# Altium PCB Synth.PcbDoc
Units mm, origin at the board's own origin, x right, y up, seen from the top; angles counter-clockwise.
Board outline 129.1 x 55.6 mm, 2 copper layers (Top Layer, Bottom Layer), stack 1.671 mm thick; 51 components, 33 nets, 121 pads, 0 vias.
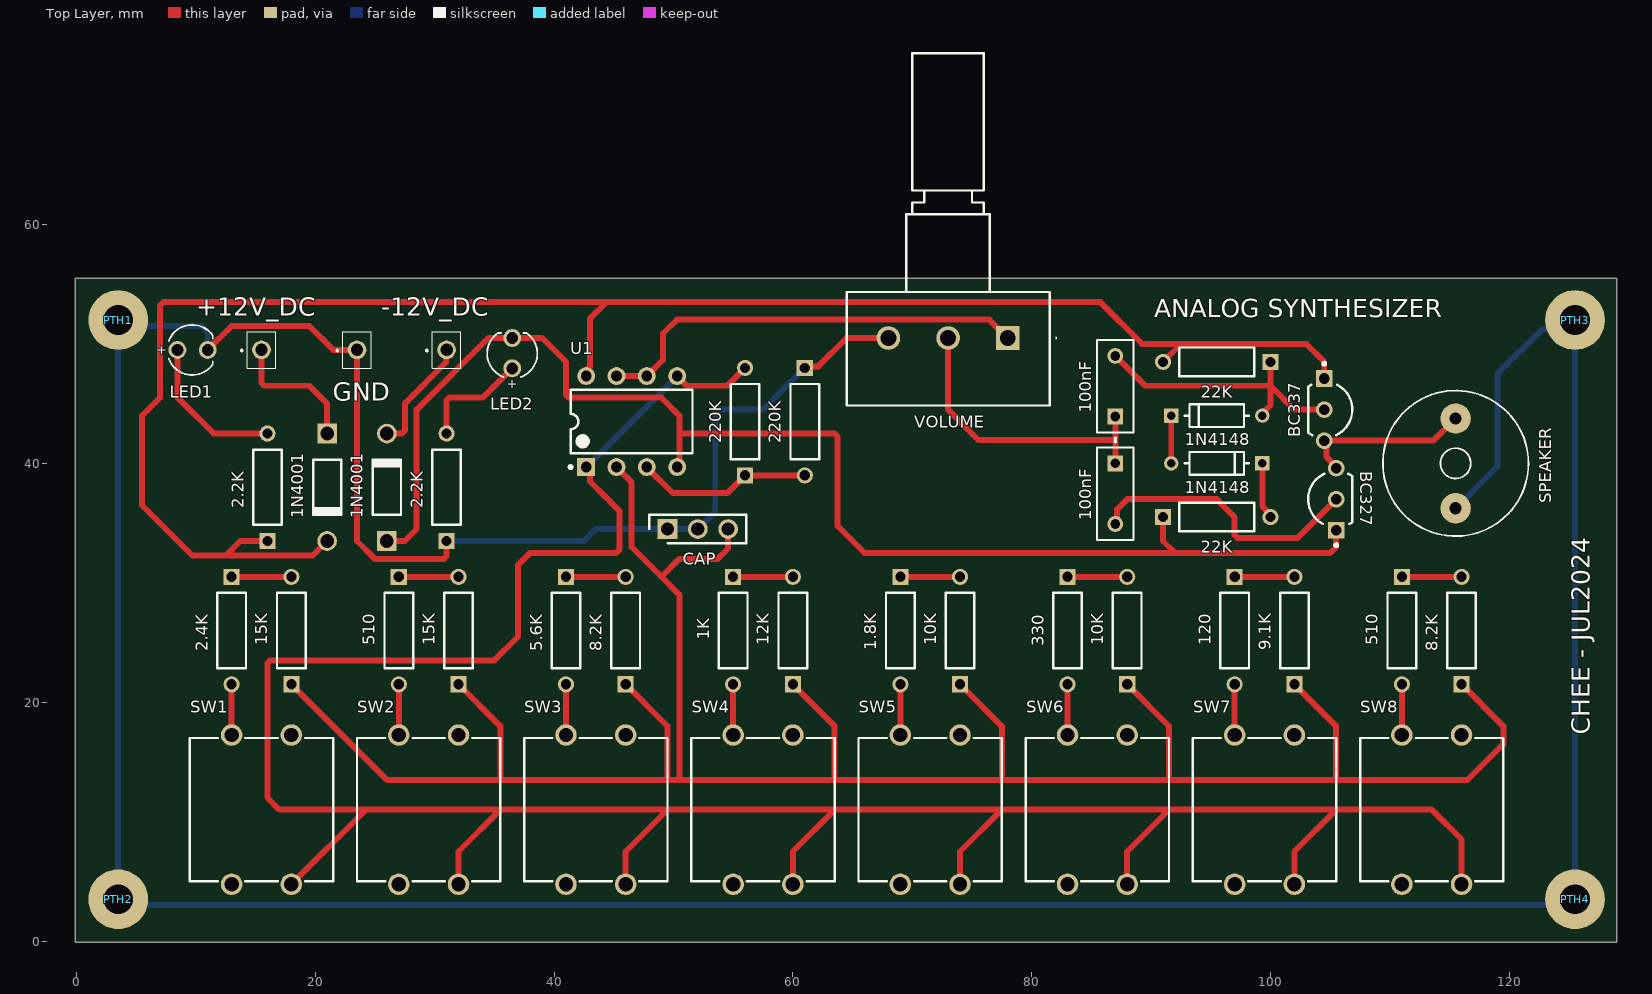
[diagram p0: Top Layer view]
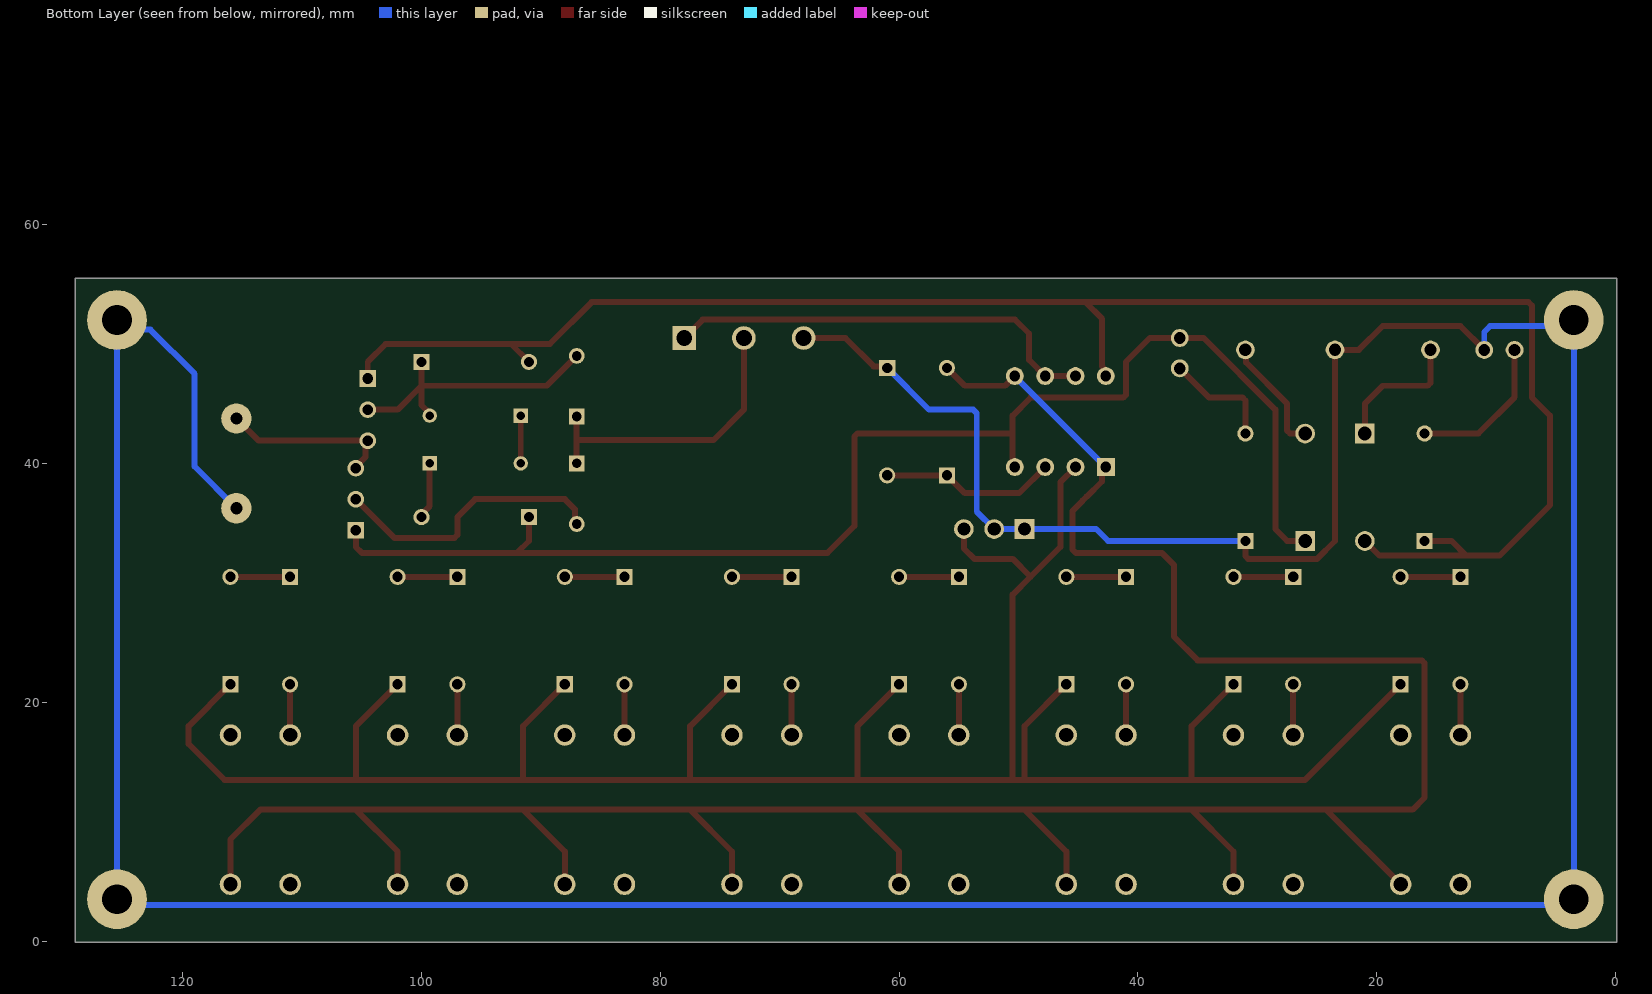
[diagram p1: Bottom Layer view, seen from below]

## Layer stack, top to bottom
Top Solder: solder mask 0.0102, Solder Resist, Dk 3.5
Top Layer: signal copper 0.0356
Dielectric 1: dielectric 1.6, FR-4, Dk 4.8
Bottom Layer: signal copper 0.0356
Bottom Solder: solder mask 0.0102, Solder Resist, Dk 3.5

## Board outline
-0.1,-0.1 129,-0.1 129,55.5 -0.1,55.5

## Design rules (kind name [scope] priority, off if disabled: settings)
Clearance Clearance_1 [All] p1: gap=0.3 ignorepadtopadclearanceinfootprint=FALSE
Clearance Clearance_1 [OnMid vs OnMid] p2: gap=0.254 ignorepadtopadclearanceinfootprint=FALSE sourcerule=40 cellrowname=All cellrowtype=0 cellcolname=All cellcoltype=0 innerlayers=TRUE
Clearance Clearance_2 [(ExistsOnLayer('Top Layer') Or ExistsOnLayer('Bottom Layer')) vs (ExistsOnLayer('Top Layer') Or ExistsOnLayer('Bottom Layer'))] p3: gap=0.254 ignorepadtopadclearanceinfootprint=FALSE sourcerule=40 cellrowname=All cellrowtype=0 cellcolname=All cellcoltype=0 outerlayers=TRUE
Clearance [All] p4: gap=0.254 ignorepadtopadclearanceinfootprint=FALSE ismatrix=TRUE
PolygonConnect [All] p1: connectstyle=Relief reliefconductorwidth=0.254 reliefentries=4 polygonreliefangle="90 Angle" airgapwidth=0.254
RoutingVias RoutingViaStyle_1 [All] p1: holewidth=0.3 width=0.6 viastyle="Through Hole" minholewidth=0.3 minwidth=0.6 maxholewidth=0.3 maxwidth=0.6
RoutingVias [All] p2: holewidth=0.711 width=1.27 viastyle="Through Hole" minholewidth=0.711 minwidth=1.27 maxholewidth=0.711 maxwidth=1.27
SilkToSolderMaskClearance [IsPad] p1: minsilkscreentomaskgap=0.1 clearancetoexposedcopper=TRUE
SolderMaskExpansion [All] p1: expansion=0.102 istentingtop=FALSE
SupplyNets "Schematic Supply Nets" [InNet('GND')] p1: voltage=0.000
Width MaxMinWidth_1 [All] p1: maxlimit=1 minlimit=0.3 preferedwidth=0.5 minimp=50.000000 maximp=50.000000 favimp=50.000000
Width [All] p2: maxlimit=0.254 minlimit=0.254 preferedwidth=0.254
29 further rules are at their usual default settings.

## Classes and differential pairs
component class Synth: 1.8K 1K 1N4001 1N4148 2.2K 2.4K 5.6K 8.2K 9.1K 10K 12K 15K 22K 120 220K 330 510 +12V_DC -12V_DC BC327 BC337 CAP GND LED1 LED2 PTH1 PTH2 PTH3 PTH4 SPEAKER SW1 SW2 SW3 SW4 SW5 SW6 SW7 SW8 U1 VOLUME

## Components (designator, comment, footprint, x,y, rotation, side; value= is the part's Value field where it differs from the comment)
1.8K "1.8K" RESA60-630X240 69,26 r270 top (schematic designator R10)
1K "1K" RESA60-630X240 55,26 r270 top (schematic designator R12)
1N4001 "1N4001-T" DIOD-DO-41-P-2_V 26,38 r90 top (schematic designator D4)
1N4001 "1N4001-T" DIOD-DO-41-P-2_V 21,38 r270 top (schematic designator D3)
1N4148 "1N4148" FP-017AG-MFG 95.5,40 r180 top (schematic designator D2)
1N4148 "1N4148" FP-017AG-MFG 95.5,44 r0 top (schematic designator D1)
2.2K "2.2K" RESA60-630X240 31,38 r90 top (schematic designator RI2)
2.2K "2.2K" RESA60-630X240 16,38 r90 top (schematic designator RI1)
2.4K "2.4K" RESA60-630X240 13,26 r270 top (schematic designator R18)
5.6K "5.6K" RESA60-630X240 41,26 r270 top (schematic designator R14)
8.2K "8.2K" RESA60-630X240 46,26 r90 top (schematic designator R13)
8.2K "8.2K" RESA60-630X240 116,26 r90 top (schematic designator R3)
9.1K "9.1K" RESA60-630X240 102,26 r90 top (schematic designator R5)
10K "10K" RESA60-630X240 74,26 r90 top (schematic designator R9)
10K "10K" RESA60-630X240 88,26 r90 top (schematic designator R7)
12K "12K" RESA60-630X240 60,26 r90 top (schematic designator R11)
15K "15K" RESA60-630X240 18,26 r90 top (schematic designator R17)
15K "15K" RESA60-630X240 32,26 r90 top (schematic designator R15)
22K "22K" RESA60-630X240 95.5,35.5 r0 top (schematic designator Rb)
22K "22K" RESA60-630X240 95.5,48.5 r180 top (schematic designator Ra)
100nF "100nF" CAP_MKT1817_7p2x2p5x6p5-5_VIS 87,40 r270 top (schematic designator C3)
100nF "100nF" CAP_MKT1817_7p2x2p5x6p5-5_VIS 87,43.92 r90 top (schematic designator C2)
120 "120" RESA60-630X240 97,26 r270 top (schematic designator R6)
220K "220K" RESA60-630X240 56,43.5 r90 top (schematic designator R2)
220K "220K" RESA60-630X240 61,43.5 r270 top (schematic designator R1)
330 "330" RESA60-630X240 83,26 r270 top (schematic designator R8)
510 "510" RESA60-630X240 27,26 r270 top (schematic designator R16)
510 "510" RESA60-630X240 111,26 r270 top (schematic designator R4)
+12V_DC "SSW-101-01-G-S" SSW-101-XX-YYY-S 15.5,49.5 r270 top
-12V_DC "SSW-101-01-G-S" SSW-101-XX-YYY-S 31,49.5 r270 top
BC327 "BC327" ONSC-TO-92-3-29-11_AM_BL 105.5,37 r90 top (schematic designator Q2)
BC337 "BC337" ONSC-TO-92-3-29-11_AM_BL 104.5,44.5 r270 top (schematic designator Q1)
CAP "SSW-103-01-G-S" RHDR3W64P0X254_1X3_813X241X851P 49.5,34.5 r0 top (schematic designator J1)
GND "SSW-101-01-G-S" SSW-101-XX-YYY-S 23.5,49.5 r270 top
LED1 "151031VS04000" WL-TMRC_D3.95H5.3 1279.73,1319.5 r0 top
LED2 "151031VS04000" WL-TMRC_D3.95H5.3 -1233.5,1319.23 r90 top
PTH1 "PTH-M2D5X5" PTH-M2D5X5 3.5,52 r0 top
PTH2 "PTH-M2D5X5" PTH-M2D5X5 3.5,3.5 r0 top
PTH3 "PTH-M2D5X5" PTH-M2D5X5 125.5,52 r0 top
PTH4 "PTH-M2D5X5" PTH-M2D5X5 125.5,3.5 r0 top
SPEAKER "SPEAKER" AL60P 115.5,40 r270 top (schematic designator HX1)
SW1 "12x12mm" 4304x60857x6 15.5,11 r270 top
SW2 "12x12mm" 4304x60857x6 29.5,11 r270 top
SW3 "12x12mm" 4304x60857x6 43.5,11 r270 top
SW4 "12x12mm" 4304x60857x6 57.5,11 r270 top
SW5 "12x12mm" 4304x60857x6 71.5,11 r270 top
SW6 "12x12mm" 4304x60857x6 85.5,11 r270 top
SW7 "12x12mm" 4304x60857x6 99.5,11 r270 top
SW8 "12x12mm" 4304x60857x6 113.5,11 r270 top
U1 "TL072CP" P0008A 46.5,43.5 r90 top
VOLUME "100k LOG" PDB181K420K104A2 78,50.5 r180 top (schematic designator VR1)

## Footprints (in the part's own frame and the unit in brackets; to place one, negate y for a bottom-side part, rotate by r counter-clockwise, add the part's x,y. Pads: shape width x height; smd on the part's side, far side on the other; paste and mask are expansions set on the pad)
4304x60857x6 [mm] "12x12mm washable Tact Switch, THT version"
  round 1.8 hole 1.2: A1(-6.25,2.5) A2(6.25,2.5) B1(-6.25,-2.5) B2(6.25,-2.5)
  silkscreen extent -6,-6 6,6, body extent -6.99,-6 6.99,6, height 8.55
AL60P [mil]
  round 100 hole 40: 1(-148,0) 2(148,0)
  silkscreen extent -240,-240 240,240
CAP_MKT1817_7p2x2p5x6p5-5_VIS [mil]
  rect 52x52 / inner round 60 / far side rect 52x52 hole 32 paste-99999 mask+0: 1(0,0)
  round 52 / inner round 60 / far side round 52 hole 32 paste-99999 mask+0: 2(200,0)
  silkscreen extent -85,-60 252,60, body extent -47,-55 247,55, height 260
DIOD-DO-41-P-2_V [mm] "2-Leads, Axial Lead, Body 4.635x2.36mm, Pin Spacing 9mm"
  rect 1.65x1.65 hole 1.15: 1(-4.5,0)
  round 1.65 hole 1.15: 2(4.5,0)
  silkscreen extent -2.32,-1.18 2.32,1.18, body extent -4.93,-1.18 4.93,1.18, height 2.35
FP-017AG-MFG [mm]
  rect 1.2x1.2 hole 0.7 paste-2539.97 mask+0: 1(-3.813,0)
  round 1.2 hole 0.7 paste-2539.97 mask+0: 2(3.813,0)
  silkscreen extent -2.68,-0.95 2.68,0.95, body extent -4.51,-1.05 4.51,1.05, height 0.25
ONSC-TO-92-3-29-11_AM_BL [mm] "TO, 3-Leads, Body Dia 4.7mm, Pitch 2.6mm"
  rect 1.4x1.4 hole 0.9: 1(-2.6,0)
  round 1.4 hole 0.9: 2(0,0) 3(2.6,0)
  silkscreen extent -3.97,-1.34 2.13,2.35, body extent -2.84,-1.34 2.84,2.35, height 5.33
P0008A [mm] "DIP, 8-Leads, Body 10.15x6.6mm, Pitch 2.54mm"
  rect 1.5x1.5 hole 0.9: 1(-3.81,3.81)
  round 1.5 hole 0.9: 2(-3.81,1.27) 3(-3.81,-1.27) 4(-3.81,-3.81) 5(3.81,-3.81) 6(3.81,-1.27) 7(3.81,1.27) 8(3.81,3.81)
  silkscreen extent -3.93,-5.1 2.65,5.23, body extent -3.95,-5.07 3.95,5.07, height 5.08
PDB181K420K104A2 [mm]
  rect 1.98x1.98 hole 1.32: 1(0,0)
  round 1.98 hole 1.32: 2(5,0) 3(10,0)
  silkscreen extent -4.1,-23.85 13.5,5.65
PTH-M2D5X5 [mm]
  round 5 hole 2.5: 1(0,0)
RESA60-630X240 [mm] "Axial Resistor, 2-Leads, Dia 2.4mm, Body Length 6.3mm"
  rect 1.35x1.35 hole 0.85: 1(-4.5,0)
  round 1.35 hole 0.85: 2(4.5,0)
  silkscreen extent -3.15,-1.2 3.15,1.2, body extent -3.15,-1.2 3.15,1.2, height 2.4
RHDR3W64P0X254_1X3_813X241X851P [mm]
  rect 1.65x1.65 hole 1.1: 1(0,0)
  round 1.65 hole 1.1: 2(2.54,0) 3(5.08,0)
  silkscreen extent -1.53,-1.2 6.61,1.2, body extent -1.53,-1.2 6.61,1.2, height 8.51
SSW-101-XX-YYY-S [mm]
  round 1.57 hole 1.04: 1(0,0)
  silkscreen extent -1.53,-1.7 1.53,1.2, body extent -1.53,-1.2 1.53,1.2, height 8.51
WL-TMRC_D3.95H5.3 [mm] "THT Mono-color Round Color LED, 2-leads"
  round 1.5 hole 1: 1(-1271.27,-1270) 2(-1268.73,-1270)
  silkscreen extent -1272,-1272.1 -1268.31,-1267.9, body extent -1271.99,-1271.97 -1268.37,-1268.03, height 5.35

## Part data
1.8K 1K 2.2K 2.2K 2.4K 5.6K 8.2K 8.2K 9.1K 10K 10K 12K 15K 15K 22K 22K 120 220K 220K 330 510 510: library part CMP-1659-00074-2, "Axial Resistor, 10 KOhm, +/- 1%, 0.25 W, -55 to 155 degC, 2-Pin THD, RoHS, Bulk", Case\/Package=Axial, Manufacturer=Yageo, Max Operating Temperature=155degC, Max Power Dissipation=250mW, Min Operating Temperature=-55degC, Package Description="2-Pin Axial Lead, Dia 2.4 mm, Body Length 6.3 mm", Package Quantity=200, Package Reference=MFR-25, Resistance=10KOhm, Temperature Coefficient=100ppm\/degreesC, Tolerance=1%, Voltage Rating=250V, Voltage Rating (DC)=200V, Composition=MetalFilm, Datasheet URL=http://www.yageo.com/documents/recent/Yageo%20LR_MFR_2013.pdf, Datasheet Version=04/2013, Lead Free=LeadFree, Length=0.248inch, Manufacturer URL=http://www.yageo.com/, Military Standard=Not, Mount=ThroughHole, Mounting Technology=ThroughHole, Number of Terminations=2, Packaging=Bulk, Power Rating=250mW, RoHSCompliant=True, Termination=Axial
1N4001 1N4001: library part CMP-0639-00006-2, "1.0 A Rectifier, 15 pF, 50 V, -65 to 150 degC, 2-Pin DO-41 Plastic, RoHS, Tape and Reel", Manufacturer="Diodes Inc", Max. Average Rectified Current IO (A)=1, Operating Temperature Range (degC)="-65 to 150", ComponentLink1Description="Manufacturer URL", ComponentLink1URL=http://diodes.com/, ComponentLink2Description=Datasheet, ComponentLink2URL=http://diodes.com/datasheets/ds28002.pdf, CT (pF)=15, DatasheetVersion="Rev. 8-2", Max. IFSM (A)=30, Max. IR (uA)=5, Mounting Technology="Through Hole", PackageDescription="2-Pin Axial Lead, Body 4.635 x 2.36 mm, Lead Spread 25.4 mm", PackageReference=DO-41-P-2, Packing="Tape and Reel", PartNumber=1N4001-T, RoHS=TRUE, VF (V)=1, VRRM (V)=50
1N4148 1N4148: library part CMP-07163-000046-1, "DIODE GEN PURP 100V 200MA DO35", Average Rectified Current=200mA, Capacitance=4pF, Case/Package=DO-35, Current=4A, Forward Current=300mA, Forward Voltage=1V, Max Forward Surge Current (Ifsm)=1A, Max Operating Temperature=175°C, Max Power Dissipation=500mW, Max Repetitive Reverse Voltage (Vrrm)=100V, Max Reverse Current=5uA, Min Operating Temperature=-65°C, Package Quantity=2000, Contact Plating=Tin, Current Rating=200mA, Diameter=1.91mm, Element Configuration=Single, Height=4.56mm, Lead Free="Lead Free", Length=4.56mm, Max Reverse Voltage (DC)=100V, Max Surge Current=4A, Mount="Through Hole", Number of Pins=2, Output Current=200mA, Outside Diameter=1.85mm, Packaging=Bulk, Peak Non-Repetitive Surge Current=4A, Polarity=Standard, Power Dissipation=500mW, Radiation Hardening=No, REACH SVHC="No SVHC", Recovery Time=4ns, Reverse Recovery Time=4ns, Reverse Voltage=100V, Series=-, Voltage=100V, Voltage Rating (DC)=100V, Weight=0.01lb, Width=1.91mm
100nF 100nF: library part CMP-001-00083-1, "MKT1817410064W", Mfr_Name=Vishay, Design Item ID=MKT1817410064W, Source=MKT1817410064W.SchLib, Type="Film Capacitors"
+12V_DC -12V_DC GND: "Connector", Manufacturer_Name=SAMTEC, Mouser Part Number=200-SSW10101GS, Arrow Part Number=SSW-101-01-G-S, Arrow Price/Stock=https://www.arrow.com/en/products/ssw-101-01-g-s/samtec, Datasheet Link=http://suddendocs.samtec.com/prints/ssw-1xx-xx-xxx-x-xx-xxx-xx-mkt.pdf, Height=8.51mm, Manufacturer_Part_Number=SSW-101-01-G-S, Mouser Price/Stock=https://www.mouser.co.uk/ProductDetail/Samtec/SSW-101-01-G-S?qs=rU5fayqh%252BE20ZXdRgwMbIg%3D%3D
BC327: library part CMP-1048-01577-1, "Amplifier Transistor, PNP Silicon, 3-Pin TO-92, Pb-Free, Ammo Box", Manufacturer="On Semiconductor", PartNumber=BC327-25ZL1G, ComponentLink1Description="Manufacturer URL", ComponentLink1URL=http://www.onsemi.com/, ComponentLink2Description=Datasheet, ComponentLink2URL=http://www.onsemi.com/pub_link/Collateral/BC327-D.PDF, ComponentLink3Description="Package Specification", ComponentLink3URL=http://www.onsemi.com/pub_link/Collateral/MAC97-D.PDF, DatasheetVersion="Rev. 6", IC Continuous (A)=-0.8, Mounting Technology="Through Hole", PackageDescription="3-Pin Transistor Outline, Body 4.825 x 3.685 mm, Pitch 1.27 mm", PackageReference=TO-92-3-29-11_AM_BL, PackageVersion="Rev. AM", Packing="Ammo Box", Polarity=PNP, RoHS=TRUE
BC337: library part CMP-1048-01583-1, "Amplifier Transistor, NPN Silicon, 3-Pin TO-92, Pb-Free, Ammo Box", Manufacturer="On Semiconductor", PartNumber=BC337-40ZL1G, ComponentLink1Description="Manufacturer URL", ComponentLink1URL=http://www.onsemi.com/, ComponentLink2Description=Datasheet, ComponentLink2URL=http://www.onsemi.com/pub_link/Collateral/BC337-D.PDF, ComponentLink3Description="Package Specification", ComponentLink3URL=http://www.onsemi.com/pub_link/Collateral/MAC97-D.PDF, DatasheetVersion="Rev. 8", IC Continuous (A)=0.8, Mounting Technology="Through Hole", PackageDescription="3-Pin Transistor Outline, Body 4.825 x 3.685 mm, Pitch 1.27 mm", PackageReference=TO-92-3-29-11_AM_BL, PackageVersion="Rev. AM", Packing="Ammo Box", Polarity=NPN, RoHS=TRUE
CAP: "Connector", Manufacturer_Name=SAMTEC, Mouser Part Number=200-SSW10301GS, Arrow Part Number=SSW-103-01-G-S, Arrow Price/Stock=https://www.arrow.com/en/products/ssw-103-01-g-s/samtec?region=europe, Datasheet Link=http://suddendocs.samtec.com/prints/ssw-1xx-xx-xxx-x-xx-xxx-xx-mkt.pdf, Height=8.51mm, Manufacturer_Part_Number=SSW-103-01-G-S, Mouser Price/Stock=https://www.mouser.co.uk/ProductDetail/Samtec/SSW-103-01-G-S?qs=rU5fayqh%252BE2RqqT6UA0Qew%3D%3D
LED1 LED2: library part CMP-1488-00001-2, Case/Package=Radial, Color=Green, Forward Current=100mA, Forward Voltage=2.1V, Max Operating Temperature=85°C, Max Reverse Voltage (DC)=5V, Min Operating Temperature=-40°C, Test Current=20mA, Dominant Wavelength=570nm, Height=5.3mm, Length=3mm, Lens Size=3mm, Lens Style="Circular, Diffused, Round", Luminous Intensity=120mcd, Mount="Through Hole", NexarPartId=29717804, Number of Pins=2, Packaging=Bulk, Peak Wavelength=573nm, REACH SVHC=Unknown, RoHS=Compliant, Viewing Angle=40°, Wavelength=570nm, Width=3mm
PTH1 PTH2 PTH3 PTH4: library part CMP-00028-00004-2, "M2 PTH (2.5mm), 5mm pad", Pins=1
SPEAKER: library part CMP-006-000000-1, "8 Ohms Low Profile Speaker 250mW 380Hz ~ 10kHz Top Round 93dB", Package="WFBGA-12 Texas Instruments", Availability=Unavailable, Component Type=Standard, Design Item ID=SPEAKER, MF="Texas Instruments", MP=SPEAKER, Pin Count=2, Price=None, SnapEDA_Link=https://www.snapeda.com/parts/SPEAKER/Texas%20Instruments/view-part/2776836/?ref=snap, Source=SnapEDAsch.SchLib
SW1 SW2 SW3 SW4 SW5 SW6 SW7 SW8: library part CMP-1456-00009-2, Contact Current Rating=50mA, Insulation Resistance=100MΩ, Max Operating Temperature=85°C, Min Operating Temperature=-40°C, Voltage Rating=12V, Actuator Length=5mm, Actuator Material="Liquid Crystal Polymer, Polymer", Contact Material="Silver, Stainless Steel", Contact Plating=Silver, Current Rating=50mA, Height=8.5mm, Illumination Type="Illuminated, Non-Illuminated", Mechanical Life=500kcycles, Mount="Through Hole", NexarPartId=31136480, Packaging=Bulk, REACH SVHC="No SVHC", RoHS=Compliant, Switch Function=Off-Mom, Switch Travel=300µm, Termination="PC Pin", Throw Configuration=SPST
U1: library part CMP-0017-00950-2, "Dual Low-Noise JFET-Input General-Purpose Operational Amplifier, 7 to 36 V, 0 to 70 degC, 8-pin DIP (P8), Pb-Free (RoHS)", Manufacturer="Texas Instruments", Rating=Catalog, Total Supply Voltage(Max)(+5V is 5, +/-5V is 10)=36, Total Supply Voltage(Min)(+5V is 5, +/-5V is 10)=7, CMRR(Min)(dB)=70, Code_JEDEC=MS-001, ComponentLink1Description="Manufacturer URL", ComponentLink1URL=http://www.ti.com/, ComponentLink2Description=Datasheet, ComponentLink2URL=http://www.ti.com/lit/ds/symlink/tl072.pdf, ComponentLink3Description="Package Specification", ComponentLink3URL=http://www.ti.com/litv/pdf/mpdi001b, DatasheetVersion=SLOS080J, Eco-Plan="Pb-Free (RoHS)", GBW(Typ)(MHz)=3, IIB(Max)(pA)=200, Iq per channel(Max)(mA)=2.5, Mounting Technology="Through Hole", Number of Channels=2, Offset Drift(Typ)(uV/C)=18, PackageDescription="8-Pin Plastic In-Line, Body 9.59 x 6.35 mm, Pitch 2.54 mm", PackageReference=P0008A, PackageVersion="4040082/E, 04/2010", PartNumber=TL072CP, Slew Rate(Typ)(V/us)=13, Sub Family="General Purpose Amplifier, High Supply Voltage Amplifier (>=30V)", Vio (25C)(Max)(mV)=10, Vn at 1kHz(Typ)(nV/rtHz)=18
VOLUME: library part PDB181-K420K-104A2, "Variable Resistor PDB181-K420K-104A2", Manufacturer_Name=Bourns, Mouser Part Number=652-PDB181K420K104A2, Arrow Part Number=PDB181-K420K-104A2, Arrow Price/Stock=https://www.arrow.com/en/products/pdb181-k420k-104a2/bourns?region=nac, Datasheet Link=https://www.bourns.com/docs/Product-Datasheets/PDB18.pdf, Height=16.5mm, Manufacturer_Part_Number=PDB181-K420K-104A2, Mouser Price/Stock=https://www.mouser.com/Search/Refine.aspx?Keyword=652-PDB181K420K104A2

## Nets (pads, with @x,y where several pads share a name; then routed paths per layer and width w, separated by ;. In a path a pad name is that pad's centre, name@x,y a point inside that pad or via, vN(x,y) a via of type N, cw(c..) or ccw(c..) an arc to the next point about the centre after c; other vN are vias at no path point)
+PWR_IND: 2.2K.2@16,42.5 LED1.1 | length 12.8
  Top Layer w0.5: LED1.1 8.46,45.54 11.5,42.5 2.2K.2@16,42.5
-PWR_IND: 2.2K.2@31,42.5 LED2.1 | length 9.4
  Top Layer w0.5: 2.2K.2@31,42.5 31,45.266 31.234,45.5 34.04,45.5 LED2.1
BUFFER: 220K.2@56,48 SW1.A2 SW2.A2 SW3.A2 SW4.A2 SW5.A2 SW6.A2 SW7.A2 SW8.A2 U1.1 U1.5 | length 234
  Top Layer w0.5: SW1.A2 24.25,11 ; SW2.A2 32,7.5 35.5,11 ; U1.1 43.017,39.363 43.017,38.483 44.29,37.21 44.308,37.21 44.63,36.888 44.63,36.87 45.5,36 45.5,32.793 45.207,32.5 38,32.5 37,31.5 37,25.5 35,23.5 16.234,23.5 16,23.266 16,12 17,11 24.25,11 ; SW3.A2 46,7.5 49.5,11 ; U1.5 U1.5@50.581,47.31 ; U1.5@50.445,47.175 51.12,46.5 54.5,46.5 220K.2@56,48 ; SW4.A2 60,7.5 63.5,11 ; SW5.A2 74,7.5 77.5,11 ; SW6.A2 88,7.5 91.5,11 ; SW7.A2 102,7.5 105.5,11 ; SW8.A2 116,8.5 113.5,11 105.5,11 ; 24.25,11 35.5,11 ; 35.5,11 49.5,11 ; 49.5,11 63.5,11 ; 63.5,11 77.5,11 ; 77.5,11 91.5,11 ; 91.5,11 105.5,11
  Bottom Layer w0.5: U1.1 U1.5
GND: 2.2K.1@31,33.5 220K.1@61,48 CAP.1 CAP.2 GND.1 LED1.2 PTH1.1 PTH2.1 PTH3.1 PTH4.1 SPEAKER.2 VOLUME.3 | length 338.4
  Top Layer w0.5: LED1.2 13,51.5 19.5,51.5 21.5,49.5 GND.1 23.5,33.5 25,32 30.766,32 31,32.234 2.2K.1@31,33.5 ; 220K.1@61,48 61.132,48.132 62.132,48.132 64.5,50.5 VOLUME.3
  Bottom Layer w0.5: LED1.2 11,51 10.5,51.5 4,51.5 PTH1.1 PTH2.1 4,3 125,3 PTH4.1 PTH3.1 124.702,51.202 122.702,51.202 119,47.5 119,39.741 SPEAKER.2 ; 2.2K.1@31,33.5 42.5,33.5 43.5,34.5 CAP.1 CAP.2 53.5,35.96 53.5,44.207 53.793,44.5 57.5,44.5 220K.1@61,48
Key1: 2.4K.2 SW1.B1 | length 4.2
  Top Layer w0.5: SW1.B1 2.4K.2
Key2: 510.2@27,21.5 SW2.B1 | length 4.2
  Top Layer w0.5: SW2.B1 510.2@27,21.5
Key3: 5.6K.2 SW3.B1 | length 4.2
  Top Layer w0.5: SW3.B1 5.6K.2
Key4: 1K.2 SW4.B1 | length 4.2
  Top Layer w0.5: SW4.B1 1K.2
Key5: 1.8K.2 SW5.B1 | length 4.2
  Top Layer w0.5: SW5.B1 1.8K.2
Key6: 330.2 SW6.B1 | length 4.2
  Top Layer w0.5: SW6.B1 330.2
Key7: 120.2 SW7.B1 | length 4.2
  Top Layer w0.5: SW7.B1 120.2
Key8: 510.2@111,21.5 SW8.B1 | length 4.2
  Top Layer w0.5: SW8.B1 510.2@111,21.5
LOG_POT: 100nF.1 VOLUME.2 | length 25
  Top Layer w0.5: VOLUME.2 73,44.5 75.54,41.96 87,41.96 ; 100nF.1@87,40 87,41.96 ; 100nF.1@87,43.92 87,41.96
Net+12V_DC_1: 1N4001.1@21,42.5 +12V_DC.1 | length 11.5
  Top Layer w0.5: +12V_DC.1 15.5,46.734 15.734,46.5 19.5,46.5 21,45 1N4001.1@21,42.5
Net-12V_DC_1: 1N4001.2@26,42.5 -12V_DC.1 | length 9.8
  Top Layer w0.5: 1N4001.2@26,42.5 27.266,42.5 27.5,42.734 27.5,45 30.956,48.456 30.956,49.456 -12V_DC.1
NetD1_1: 1N4148.1@91.687,44 1N4148.2@91.687,40 | length 4
  Top Layer w0.5: 1N4148.2@91.687,40 1N4148.1@91.687,44
NetD2_1: 1N4148.1@99.313,40 22K.2@100,35.5 | length 4.8
  Top Layer w0.5: 1N4148.1@99.313,40 99.313,36.417 100,35.73 22K.2@100,35.5
NetD3_2: 1N4001.2@21,33.5 2.2K.1@16,33.5 22K.2@91,48.5 BC337.1 U1.8 | length 149.2
  Top Layer w0.5: 2.2K.1@16,33.5 13.725,33.5 12.5,32.275 ; 1N4001.2@21,33.5 19.775,32.275 12.5,32.275 ; U1.8 42.881,47.501 42.881,47.984 43,48.103 43,52.109 44.391,53.5 ; 22K.2@91,48.5 92.5,50 ; BC337.1 104.5,48.5 103,50 92.5,50 ; 12.5,32.275 9.725,32.275 5.5,36.5 5.5,44 7,45.5 7,53.207 7.293,53.5 44.391,53.5 ; 44.391,53.5 85.75,53.5 89.25,50 92.5,50
NetD4_1: 1N4001.1@26,33.5 22K.1@91,35.5 BC327.1 LED2.2 U1.4 | length 114.7
  Top Layer w0.5: 1N4001.1@26,33.5 27.5,33.5 28.5,34.5 28.5,44.5 34.5,50.5 LED2.2 39,50.5 41,48.5 41,45.734 41.234,45.5 49,45.5 50.5,44 50.5,42.5 ; U1.4 50.5,39.88 50.5,42.5 ; 22K.1@91,35.5 91,33.5 92,32.5 ; BC327.1 105.5,33 105,32.5 92,32.5 ; 50.5,42.5 63.5,42.5 63.734,42.266 63.734,34.766 66,32.5 92,32.5
NetR1_2: 220K.1@56,39 220K.2@61,39 U1.3 | length 14.8
  Top Layer w0.5: U1.3 49.96,37.5 54.5,37.5 56,39 220K.2@61,39
NetR3_2: 8.2K.2@116,30.5 510.1@111,30.5 | length 5
  Top Layer w0.5: 510.1@111,30.5 8.2K.2@116,30.5
NetR5_2: 9.1K.2 120.1 | length 5
  Top Layer w0.5: 120.1 9.1K.2
NetR7_2: 10K.2@88,30.5 330.1 | length 5
  Top Layer w0.5: 330.1 10K.2@88,30.5
NetR9_2: 1.8K.1 10K.2@74,30.5 | length 5
  Top Layer w0.5: 1.8K.1 10K.2@74,30.5
NetR11_2: 1K.1 12K.2 | length 5
  Top Layer w0.5: 1K.1 12K.2
NetR13_2: 5.6K.1 8.2K.2@46,30.5 | length 5
  Top Layer w0.5: 5.6K.1 8.2K.2@46,30.5
NetR15_2: 15K.2@32,30.5 510.1@27,30.5 | length 5
  Top Layer w0.5: 510.1@27,30.5 15K.2@32,30.5
NetR17_2: 2.4K.1 15K.2@18,30.5 | length 5
  Top Layer w0.5: 2.4K.1 15K.2@18,30.5
NetU1_6: U1.6 U1.7 VOLUME.1 | length 36.7
  Top Layer w0.5: U1.7 U1.6 49.127,48.667 49.127,50.874 50.293,52.04 76.46,52.04 VOLUME.1
NPN: 1N4148.2@99.313,44 22K.1@100,48.5 100nF.2@87,49 BC337.2 | length 24.1
  Top Layer w0.5: 100nF.2@87,49 89.5,46.5 100,46.5 ; 1N4148.2@99.313,44 99.313,44.189 100,44.876 100,46.5 ; 22K.1@100,48.5 100,46.5 ; BC337.2 102,44.5 100,46.5
OSCILLATOR: 8.2K.1 9.1K.1 10K.1 12K.1 15K.1 CAP.3 U1.2 | length 205.8
  Top Layer w0.5: 15K.1@18,21.5 26,13.5 35.5,13.5 ; 15K.1@32,21.5 35.5,18 35.5,13.5 ; U1.2 46.5,38.42 46.5,33 49,30.5 ; 8.2K.1@46,21.5 49.5,18 49.5,13.5 ; CAP.3 54.58,32.873 53.707,32 50.5,32 49,30.5 ; 12K.1 63.5,18 63.5,13.5 ; 10K.1@74,21.5 77.5,18 77.5,13.5 ; 10K.1@88,21.5 91.5,18 91.5,13.5 ; 9.1K.1 105.5,18 105.5,13.5 ; 8.2K.1@116,21.5 119.5,18 119.5,16.5 116.5,13.5 105.5,13.5 ; 35.5,13.5 49.5,13.5 ; 49,30.5 50.5,29 50.5,13.5 ; 49.5,13.5 50.5,13.5 ; 50.5,13.5 63.5,13.5 ; 63.5,13.5 77.5,13.5 ; 77.5,13.5 91.5,13.5 ; 91.5,13.5 105.5,13.5
PNP: 100nF.2@87,34.92 BC327.2 | length 23.6
  Top Layer w0.5: 100nF.2@87,34.92 87.157,35.077 87.157,36.157 88,37 95.5,37 97,35.5 97,34 97.234,33.766 102.266,33.766 BC327.2
SPEAKER: BC327.3 BC337.3 SPEAKER.1 | length 14.5
  Top Layer w0.5: BC327.3 105.5,39.712 104.672,40.54 104.672,41.728 BC337.3 113.641,41.9 SPEAKER.1
pads on no net: SW1.A1 SW1.B2 SW2.A1 SW2.B2 SW3.A1 SW3.B2 SW4.A1 SW4.B2 SW5.A1 SW5.B2 SW6.A1 SW6.B2 SW7.A1 SW7.B2 SW8.A1 SW8.B2

## Silkscreen, mask and mechanical layers (free items; w line width, h text height)
Top Overlay:
  text "ANALOG SYNTHESIZER" at 90.254,52.254 h1.52
  text "CHEE - JUL2024" at 126.746,17.254 h1.52 r90

## Text inside footprints (layer, text, board x,y; h text height)
LED1: Top Overlay "+" at 6.68,49.15 h0.8
LED2: Top Overlay "+" at 36.85,46.18 h0.8 r90